# EAGLE board main-board (EAGLE 9.6.2)

Size 134.11 x 42.98 mm. Coordinates in mm from the lower left corner, seen from the top.
Outline: 0,42.98 0,0 134.11,0 134.11,42.98 0,42.98
Outline: circle at 105.03,30.91 radius 1.78
Outline: circle at 44.02,21.89 radius 1.78
Outline: circle at 31.12,35.99 radius 1.78
Copper layers (1*16): Top 0.035mm / dielectric 1.5mm / Bottom 0.035mm
Design rules "default": minimum track width 6mil, minimum drill 0.35mm, track to track 6mil, track to pad 6mil, pad to pad 6mil, via to via 6mil, smd to smd 6mil, copper to edge 40mil, drill to drill 6mil, minimum pad ring 10mil, minimum via ring 8mil, stop-mask expansion 4mil, vias tented up to drill 0mil, thermal gap 10mil
Net classes: 1 AC: width 2.032 mm

## Footprints (pad centres in the part's own frame; a part is rotated, then mirrored left to right if it is on the bottom)
C050-030X075 = drill 0.813 octagon: 1 -2.54,0; 2 2.54,0
R1206 = smd 1.6 x 1.803: 1 -1.422,0; 2 1.422,0
0204/7 = drill 0.813 octagon: 1 -3.81,0; 2 3.81,0
TO220BV = drill 1.016 long: G 2.54,-2.54; T1 -2.54,-2.54; T2 0,-2.54
MOC3012M = drill 0.8 square: 1 -3.81,2.54 | drill 0.8: 2 -3.81,0; 3 -3.81,-2.54; 4 3.81,-2.54; 5 3.81,0; 6 3.81,2.54
SO16 = smd 0.66 x 2.032: 1 -4.445,-3.073; 2 -3.175,-3.073; 3 -1.905,-3.073; 4 -0.635,-3.073; 5 0.635,-3.073; 6 1.905,-3.073; 7 3.175,-3.073; 8 4.445,-3.073; 9 4.445,3.073; 10 3.175,3.073; 11 1.905,3.073; 12 0.635,3.073; 13 -0.635,3.073; 14 -1.905,3.073; 15 -3.175,3.073; 16 -4.445,3.073
5566-2 = drill 1.4 square: 1 0,-2.75; 2 0,2.75
5566-4 = drill 1.4 square: 1 2.1,-2.75; 2 -2.1,-2.75; 3 2.1,2.75; 4 -2.1,2.75
ESP-201 = drill 1.016 long: 3V3 0,2.54; 3V3_2 0,0; 3V3_3 7.62,27.94; ADC 21.59,7.62; CH_PD 21.59,12.7; CLK 0,17.78; CMD 0,15.24; D0 0,12.7; D1 0,10.16; D2 0,20.32; D3 0,7.62; GND 21.59,2.54; GND_2 21.59,0; GND_3 15.24,27.94; GPIO0 0,25.4; GPIO2 0,22.86; GPIO4 0,5.08; GPIO5 21.59,5.08; GPIO12 21.59,20.32; GPIO13 21.59,22.86; GPIO14 21.59,17.78; GPIO15 21.59,25.4; RST 21.59,10.16; RX 10.16,27.94; TX 12.7,27.94; XPD 21.59,15.24

## Placement (x,y rotation side)
ACSW1:C1  [C050-030X075]  -62.86,-36.4 0 top  (outside the outline)
ACSW1:R1  100  [R1206]  -65.41,-21.16 0 top  (outside the outline)
ACSW1:R2  360  [R1206]  -52.7,-21.16 0 top  (outside the outline)
ACSW1:R3  [0204/7]  -62.86,-41.48 0 top  (outside the outline)
ACSW1:T1  BT138-V  [TO220BV]  -9.52,4.24 0 top  (outside the outline)
ACSW1:U1  MOC3012M  [MOC3012M]  -19.68,16.94 0 top  (outside the outline)
ACSW2:C1  [C050-030X075]  -50.16,-36.4 0 top  (outside the outline)
ACSW2:R1  100  [R1206]  -40,-21.16 0 top  (outside the outline)
ACSW2:R2  360  [R1206]  -27.3,-21.16 0 top  (outside the outline)
ACSW2:R3  [0204/7]  -52.7,-41.48 0 top  (outside the outline)
ACSW2:T1  BT138-V  [TO220BV]  -60.32,-8.46 0 top  (outside the outline)
ACSW2:U1  MOC3012M  [MOC3012M]  -60.32,-0.84 0 top  (outside the outline)
ACSW3:C1  [C050-030X075]  -37.46,-36.4 0 top  (outside the outline)
ACSW3:R1  100  [R1206]  -14.6,-21.16 0 top  (outside the outline)
ACSW3:R2  360  [R1206]  -65.41,-28.78 0 top  (outside the outline)
ACSW3:R3  [0204/7]  -42.55,-41.48 0 top  (outside the outline)
ACSW3:T1  BT138-V  [TO220BV]  -47.62,-8.46 0 top  (outside the outline)
ACSW3:U1  MOC3012M  [MOC3012M]  -47.62,-0.84 0 top  (outside the outline)
ACSW4:C1  [C050-030X075]  -24.76,-36.4 0 top  (outside the outline)
ACSW4:R1  100  [R1206]  -52.7,-28.78 0 top  (outside the outline)
ACSW4:R2  360  [R1206]  -40,-28.78 0 top  (outside the outline)
ACSW4:R3  [0204/7]  -32.38,-41.48 0 top  (outside the outline)
ACSW4:T1  BT138-V  [TO220BV]  -34.92,-8.46 0 top  (outside the outline)
ACSW4:U1  MOC3012M  [MOC3012M]  -37.46,-3.38 0 top  (outside the outline)
ACSW5:C1  [C050-030X075]  -12.06,-36.4 0 top  (outside the outline)
ACSW5:R1  100  [R1206]  -27.3,-28.78 0 top  (outside the outline)
ACSW5:R2  360  [R1206]  -14.6,-28.78 0 top  (outside the outline)
ACSW5:R3  [0204/7]  -22.22,-41.48 0 top  (outside the outline)
ACSW5:T1  BT138-V  [TO220BV]  -22.22,-8.46 0 top  (outside the outline)
ACSW5:U1  MOC3012M  [MOC3012M]  -22.22,-0.84 0 top  (outside the outline)
IC1  74LS595D  [SO16]  -29.84,52.5 0 top  (outside the outline)
LAMP1  5566-2  [5566-2]  -52.7,14.4 0 top  (outside the outline)
LAMP2  5566-2  [5566-2]  -45.08,14.4 0 top  (outside the outline)
MOTOR  5566-4  [5566-4]  -65.41,14.4 0 top  (outside the outline)
PWR  5566-2  [5566-2]  -37.46,14.4 0 top  (outside the outline)
PWR2  5566-2  [5566-2]  -29.84,14.4 0 top  (outside the outline)
U$1  ESP-201  [ESP-201]  -95.88,-36.4 0 top  (outside the outline)

## Library data of the parts
ACSW1:C1 ACSW1:R1 ACSW1:R2 ACSW2:C1 ACSW2:R1 ACSW2:R2 ACSW3:C1 ACSW3:R1 ACSW3:R2 ACSW4:C1 ACSW4:R1 ACSW4:R2 ACSW5:C1 ACSW5:R1 ACSW5:R2 = resistor
ACSW1:R3 ACSW2:R3 ACSW3:R3 ACSW4:R3 ACSW5:R3 = resistor; SPICEPREFIX: R
ACSW1:T1 ACSW2:T1 ACSW3:T1 ACSW4:T1 ACSW5:T1 = triac
ACSW1:U1 ACSW2:U1 ACSW3:U1 ACSW4:U1 ACSW5:U1 = IC; CREATED_BY: PCBLayout.com; DIGIKEY_PARTNO: MOC3012M-ND; MANUFACTURER: ON Semiconductor; MPN: MOC3012M; PACKAGE: DIP-06
IC1 = 74xx-us
LAMP1 LAMP2 PWR PWR2 = omez-packs; MF: MOLEX; OC_FARNELL: 1822072; OC_NEWARK: unknown
MOTOR = omez-packs; MF: MOLEX; OC_FARNELL: unknown; OC_NEWARK: unknown
U$1 = esp8266modules; DIMENSIONS: 25 x 35 mm; PINS: 26; PITCH: 0.1" / 2.54 mm

## Nets
ACSW1:AC+: ACSW1:R3.2 ACSW1:T1.T2 ACSW1:U1.6
ACSW1:AC-: ACSW1:C1.2 ACSW1:T1.T1
ACSW1:GND: ACSW1:U1.2
ACSW1:N$1: ACSW1:R1.2 ACSW1:U1.1
ACSW1:N$2: ACSW1:R2.1 ACSW1:U1.4
ACSW1:N$5: ACSW1:R2.2 ACSW1:T1.G
ACSW1:N$8: ACSW1:C1.1 ACSW1:R3.1
ACSW2:AC+: ACSW2:R3.2 ACSW2:T1.T2 ACSW2:U1.6
ACSW2:AC-: ACSW2:C1.2 ACSW2:T1.T1
ACSW2:N$1: ACSW2:R1.2 ACSW2:U1.1
ACSW2:N$2: ACSW2:R2.1 ACSW2:U1.4
ACSW2:N$5: ACSW2:R2.2 ACSW2:T1.G
ACSW2:N$8: ACSW2:C1.1 ACSW2:R3.1
ACSW3:AC+: ACSW3:R3.2 ACSW3:T1.T2 ACSW3:U1.6
ACSW3:AC-: ACSW3:C1.2 ACSW3:T1.T1
ACSW3:N$1: ACSW3:R1.2 ACSW3:U1.1
ACSW3:N$2: ACSW3:R2.1 ACSW3:U1.4
ACSW3:N$5: ACSW3:R2.2 ACSW3:T1.G
ACSW3:N$8: ACSW3:C1.1 ACSW3:R3.1
ACSW4:AC+: ACSW4:R3.2 ACSW4:T1.T2 ACSW4:U1.6
ACSW4:AC-: ACSW4:C1.2 ACSW4:T1.T1
ACSW4:N$1: ACSW4:R1.2 ACSW4:U1.1
ACSW4:N$2: ACSW4:R2.1 ACSW4:U1.4
ACSW4:N$5: ACSW4:R2.2 ACSW4:T1.G
ACSW4:N$8: ACSW4:C1.1 ACSW4:R3.1
ACSW5:AC+: ACSW5:R3.2 ACSW5:T1.T2 ACSW5:U1.6
ACSW5:AC-: ACSW5:C1.2 ACSW5:T1.T1
ACSW5:N$1: ACSW5:R1.2 ACSW5:U1.1
ACSW5:N$2: ACSW5:R2.1 ACSW5:U1.4
ACSW5:N$5: ACSW5:R2.2 ACSW5:T1.G
ACSW5:N$8: ACSW5:C1.1 ACSW5:R3.1
GND: ACSW2:U1.2 ACSW3:U1.2 ACSW4:U1.2 ACSW5:U1.2 IC1.8 IC1.13
LAMP1: LAMP1.2
LAMP2: LAMP2.2
MS1: MOTOR.2
MS2: MOTOR.3
MS3: MOTOR.4
N$1: ACSW1:R1.1 IC1.15
N$2: ACSW2:R1.1 IC1.1
N$3: ACSW3:R1.1 IC1.2
N$4: ACSW4:R1.1 IC1.3
N$5: ACSW5:R1.1 IC1.4
PWR+ [AC]: PWR2.2 PWR.2
PWR- [AC]: LAMP1.1 LAMP2.1 MOTOR.1 PWR2.1 PWR.1
VCC: IC1.16

## Tracks (layer width: path | path; a pad name or v marks a point on that pad's centre or on a via)
ACSW1:AC+  (2 unrouted)
ACSW1:AC-  (1 unrouted)
ACSW1:N$1  (1 unrouted)
ACSW1:N$2  (1 unrouted)
ACSW1:N$5  (1 unrouted)
ACSW1:N$8  (1 unrouted)
ACSW2:AC+  (2 unrouted)
ACSW2:AC-  (1 unrouted)
ACSW2:N$1  (1 unrouted)
ACSW2:N$2  (1 unrouted)
ACSW2:N$5  (1 unrouted)
ACSW2:N$8  (1 unrouted)
ACSW3:AC+  (2 unrouted)
ACSW3:AC-  (1 unrouted)
ACSW3:N$1  (1 unrouted)
ACSW3:N$2  (1 unrouted)
ACSW3:N$5  (1 unrouted)
ACSW3:N$8  (1 unrouted)
ACSW4:AC+  (2 unrouted)
ACSW4:AC-  (1 unrouted)
ACSW4:N$1  (1 unrouted)
ACSW4:N$2  (1 unrouted)
ACSW4:N$5  (1 unrouted)
ACSW4:N$8  (1 unrouted)
ACSW5:AC+  (2 unrouted)
ACSW5:AC-  (1 unrouted)
ACSW5:N$1  (1 unrouted)
ACSW5:N$2  (1 unrouted)
ACSW5:N$5  (1 unrouted)
ACSW5:N$8  (1 unrouted)
GND  (5 unrouted)
N$1  (1 unrouted)
N$2  (1 unrouted)
N$3  (1 unrouted)
N$4  (1 unrouted)
N$5  (1 unrouted)
PWR+  (1 unrouted)
PWR-  (4 unrouted)